# EAGLE board scenes main (EAGLE 7.4.0)
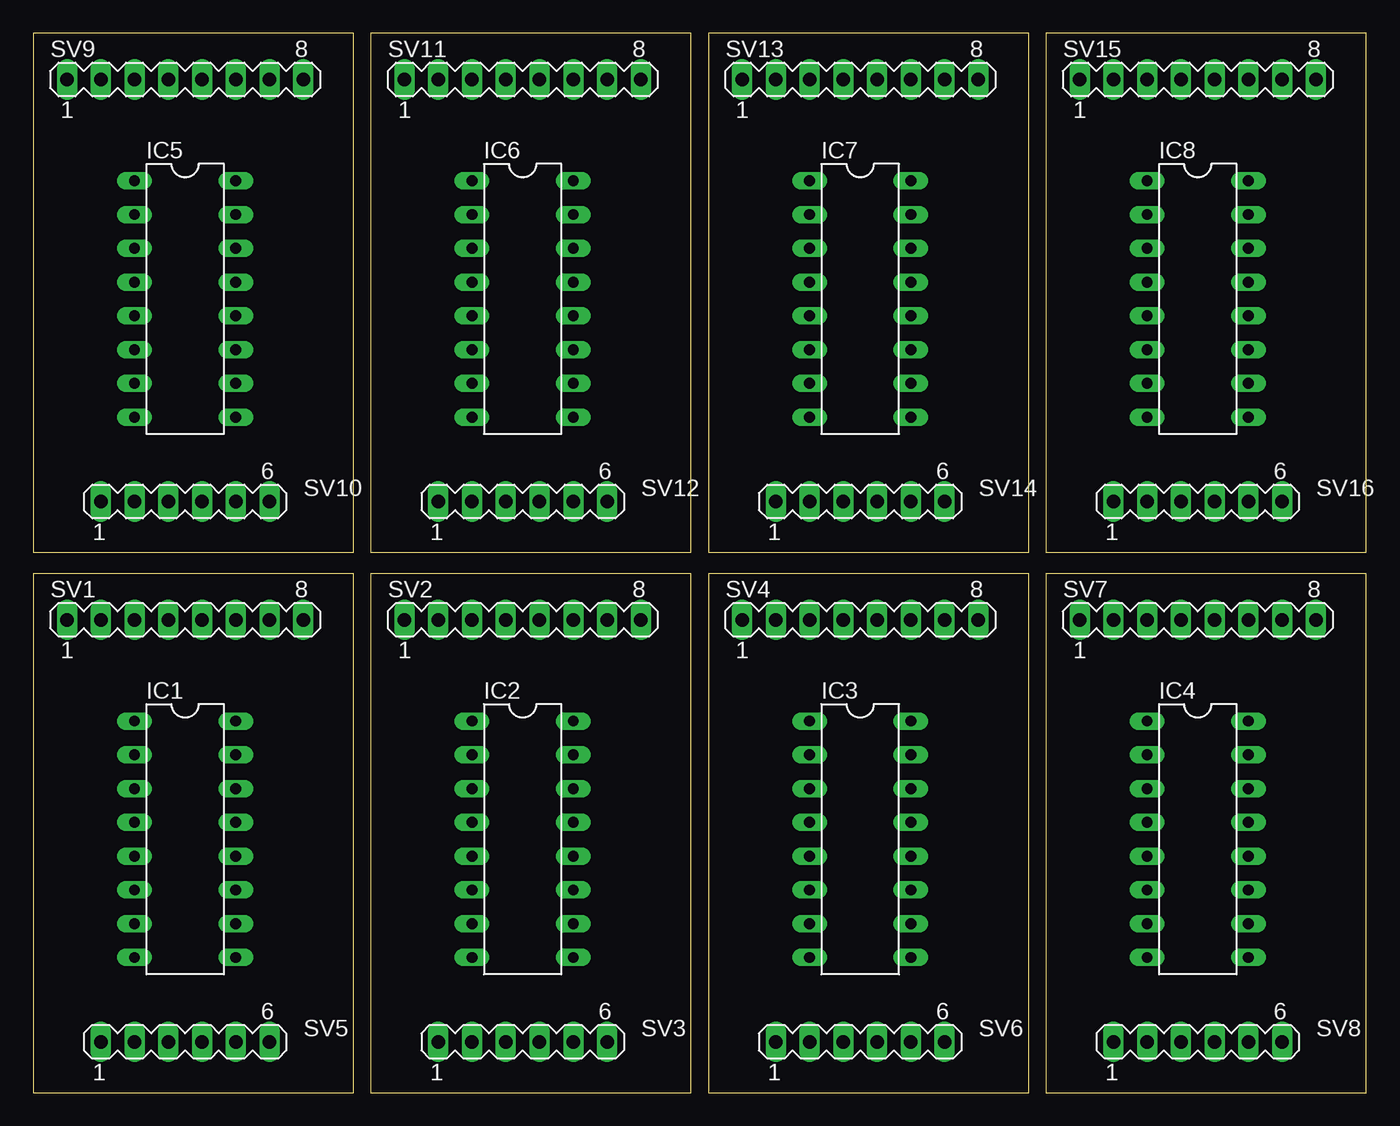
[diagram p0: board, top side]
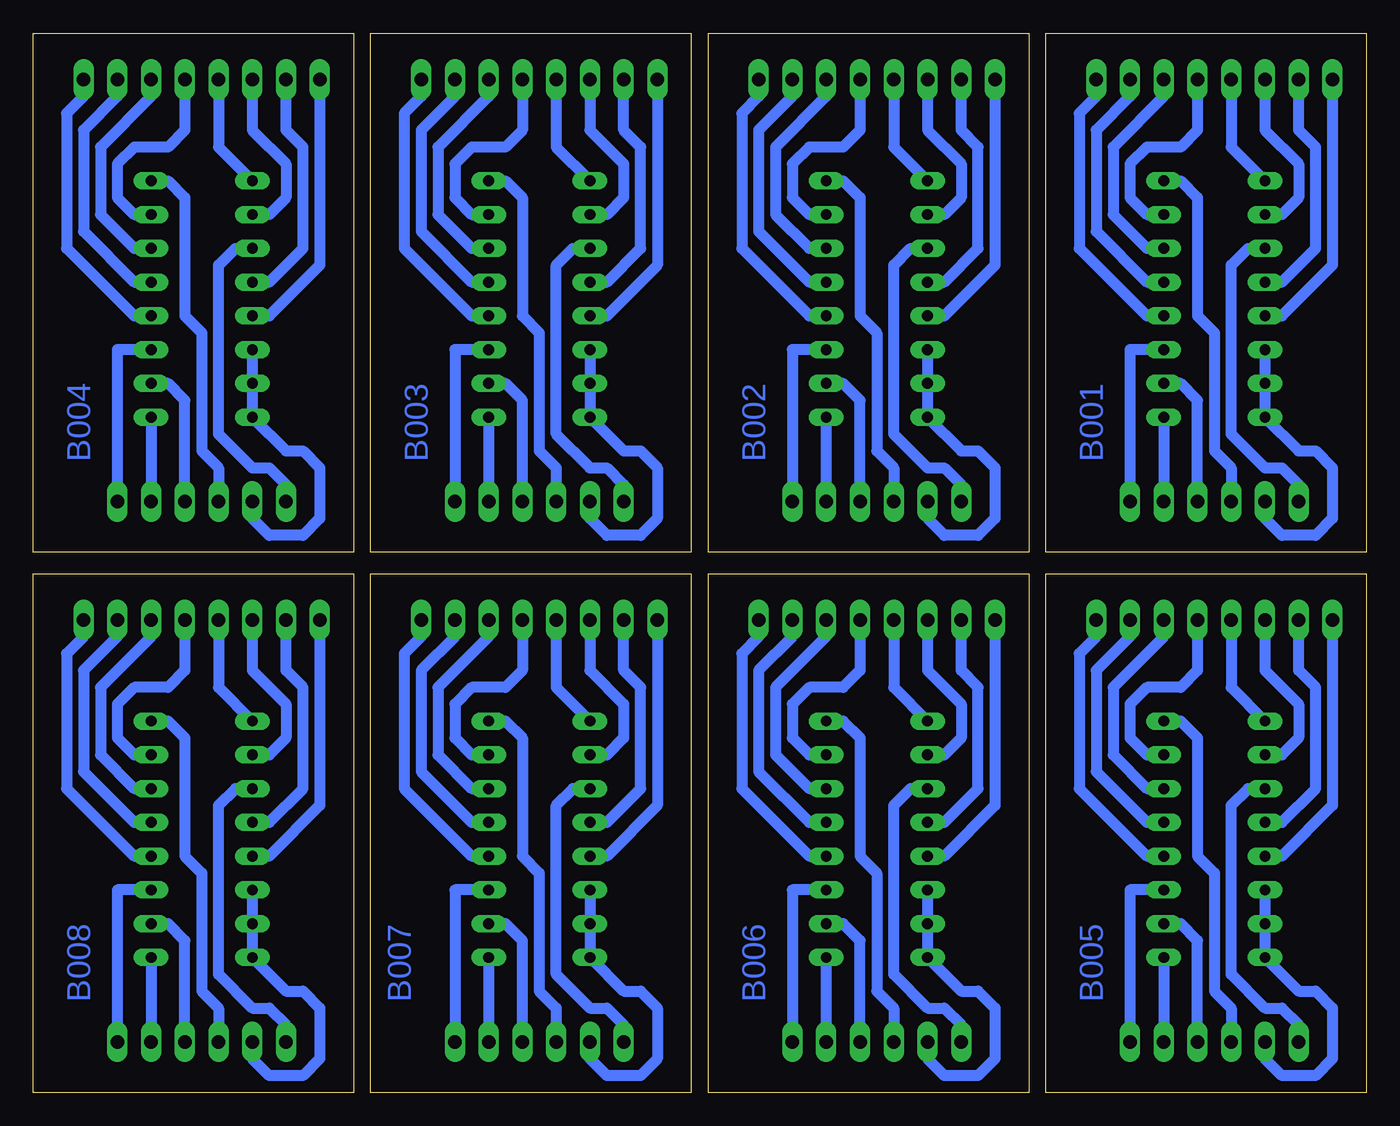
[diagram p1: board, bottom side, seen from below]

Size 100.31 x 79.68 mm. Coordinates in mm from the lower left corner, seen from the top.
Outline: 0,0 24.11,0 24.11,39.04 0,39.04 0,0
Outline: 25.4,0 49.51,0 49.51,39.04 25.4,39.04 25.4,0
Outline: 50.8,0 74.91,0 74.91,39.04 50.8,39.04 50.8,0
Outline: 76.2,0 100.31,0 100.31,39.04 76.2,39.04 76.2,0
Outline: 0,40.64 24.11,40.64 24.11,79.68 0,79.68 0,40.64
Outline: 25.4,40.64 49.51,40.64 49.51,79.68 25.4,79.68 25.4,40.64
Outline: 50.8,40.64 74.91,40.64 74.91,79.68 50.8,79.68 50.8,40.64
Outline: 76.2,40.64 100.31,40.64 100.31,79.68 76.2,79.68 76.2,40.64
Copper layers (1*16): Top 0.035mm / dielectric 1.5mm / Bottom 0.035mm
Design rules "default": minimum track width 10mil, minimum drill 24mil, track to track 8mil, track to pad 8mil, pad to pad 8mil, via to via 8mil, smd to smd 8mil, copper to edge 40mil, drill to drill 8mil, minimum pad ring 10mil, minimum via ring 8mil, stop-mask expansion 4mil, vias tented up to drill 0mil, thermal gap 10mil

## Footprints (pad centres in the part's own frame; a part is rotated, then mirrored left to right if it is on the bottom)
DIL16 = drill 0.813 long: 1 -8.89,-3.81; 2 -6.35,-3.81; 3 -3.81,-3.81; 4 -1.27,-3.81; 5 1.27,-3.81; 6 3.81,-3.81; 7 6.35,-3.81; 8 8.89,-3.81; 9 8.89,3.81; 10 6.35,3.81; 11 3.81,3.81; 12 1.27,3.81; 13 -1.27,3.81; 14 -3.81,3.81; 15 -6.35,3.81; 16 -8.89,3.81
MA08-1 = drill 1.016 long: 1 -8.89,0; 2 -6.35,0; 3 -3.81,0; 4 -1.27,0; 5 1.27,0; 6 3.81,0; 7 6.35,0; 8 8.89,0
MA06-1 = drill 1.016 long: 1 -6.35,0; 2 -3.81,0; 3 -1.27,0; 4 1.27,0; 5 3.81,0; 6 6.35,0

## Placement (x,y rotation side)
IC1  4051N  [DIL16]  11.43,19.05 270 top
IC2  4051N  [DIL16]  36.83,19.05 270 top
IC3  4051N  [DIL16]  62.23,19.05 270 top
IC4  4051N  [DIL16]  87.63,19.05 270 top
IC5  4051N  [DIL16]  11.43,59.69 270 top
IC6  4051N  [DIL16]  36.83,59.69 270 top
IC7  4051N  [DIL16]  62.23,59.69 270 top
IC8  4051N  [DIL16]  87.63,59.69 270 top
SV1  [MA08-1]  11.43,35.56 0 top
SV2  [MA08-1]  36.83,35.56 0 top
SV3  [MA06-1]  36.83,3.81 0 top
SV4  [MA08-1]  62.23,35.56 0 top
SV5  [MA06-1]  11.43,3.81 0 top
SV6  [MA06-1]  62.23,3.81 0 top
SV7  [MA08-1]  87.63,35.56 0 top
SV8  [MA06-1]  87.63,3.81 0 top
SV9  [MA08-1]  11.43,76.2 0 top
SV10  [MA06-1]  11.43,44.45 0 top
SV11  [MA08-1]  36.83,76.2 0 top
SV12  [MA06-1]  36.83,44.45 0 top
SV13  [MA08-1]  62.23,76.2 0 top
SV14  [MA06-1]  62.23,44.45 0 top
SV15  [MA08-1]  87.63,76.2 0 top
SV16  [MA06-1]  87.63,44.45 0 top

## Library data of the parts
IC1-IC8 = 40xx
SV1-SV16 = con-lstb; OC_FARNELL: unknown; OC_NEWARK: unknown

## Nets
GND: IC1.6 IC1.8 SV5.2
GND1: IC2.6 IC2.8 SV3.2
GND2: IC3.6 IC3.8 SV6.2
GND3: IC4.6 IC4.8 SV8.2
GND4: IC5.6 IC5.8 SV10.2
GND5: IC6.6 IC6.8 SV12.2
GND6: IC7.6 IC7.8 SV14.2
GND7: IC8.6 IC8.8 SV16.2
N$1: IC1.1 SV1.4
N$2: IC1.2 SV1.3
N$3: IC1.4 SV1.2
N$4: IC1.5 SV1.1
N$5: IC1.15 SV1.5
N$6: IC1.14 SV1.6
N$7: IC1.13 SV1.7
N$8: IC1.12 SV1.8
N$9: IC1.9 SV5.5
N$10: IC1.10 SV5.4
N$11: IC1.11 SV5.6
N$12: IC2.1 SV2.4
N$13: IC2.2 SV2.3
N$14: IC2.4 SV2.2
N$15: IC2.5 SV2.1
N$16: IC2.15 SV2.5
N$17: IC2.14 SV2.6
N$18: IC2.13 SV2.7
N$19: IC2.12 SV2.8
N$20: IC2.3 SV3.1
N$21: IC2.9 SV3.5
N$22: IC2.10 SV3.4
N$23: IC2.11 SV3.6
N$24: IC3.1 SV4.4
N$25: IC3.2 SV4.3
N$26: IC3.4 SV4.2
N$27: IC3.5 SV4.1
N$28: IC3.15 SV4.5
N$29: IC3.14 SV4.6
N$30: IC3.13 SV4.7
N$31: IC3.12 SV4.8
N$32: IC3.3 SV6.1
N$33: IC3.9 SV6.5
N$34: IC3.10 SV6.4
N$35: IC3.11 SV6.6
N$36: IC4.1 SV7.4
N$37: IC4.2 SV7.3
N$38: IC4.4 SV7.2
N$39: IC4.5 SV7.1
N$40: IC4.15 SV7.5
N$41: IC4.14 SV7.6
N$42: IC4.13 SV7.7
N$43: IC4.12 SV7.8
N$44: IC4.3 SV8.1
N$45: IC4.9 SV8.5
N$46: IC4.10 SV8.4
N$47: IC4.11 SV8.6
N$48: IC5.1 SV9.4
N$49: IC5.2 SV9.3
N$50: IC5.4 SV9.2
N$51: IC5.5 SV9.1
N$52: IC5.15 SV9.5
N$53: IC5.14 SV9.6
N$54: IC5.13 SV9.7
N$55: IC5.12 SV9.8
N$56: IC5.3 SV10.1
N$57: IC5.9 SV10.5
N$58: IC5.10 SV10.4
N$59: IC5.11 SV10.6
N$60: IC6.1 SV11.4
N$61: IC6.2 SV11.3
N$62: IC6.4 SV11.2
N$63: IC6.5 SV11.1
N$64: IC6.15 SV11.5
N$65: IC6.14 SV11.6
N$66: IC6.13 SV11.7
N$67: IC6.12 SV11.8
N$68: IC6.3 SV12.1
N$69: IC6.9 SV12.5
N$70: IC6.10 SV12.4
N$71: IC6.11 SV12.6
N$72: IC7.1 SV13.4
N$73: IC7.2 SV13.3
N$74: IC7.4 SV13.2
N$75: IC1.3 SV5.1
N$83: IC7.5 SV13.1
N$84: IC7.15 SV13.5
N$85: IC7.14 SV13.6
N$86: IC7.13 SV13.7
N$87: IC7.12 SV13.8
N$88: IC7.3 SV14.1
N$89: IC7.9 SV14.5
N$90: IC7.10 SV14.4
N$91: IC7.11 SV14.6
N$92: IC8.1 SV15.4
N$93: IC8.2 SV15.3
N$94: IC8.4 SV15.2
N$95: IC8.5 SV15.1
N$96: IC8.15 SV15.5
N$97: IC8.14 SV15.6
N$98: IC8.13 SV15.7
N$99: IC8.12 SV15.8
N$100: IC8.3 SV16.1
N$101: IC8.9 SV16.5
N$102: IC8.10 SV16.4
N$103: IC8.11 SV16.6
VCC: IC1.16 SV5.3
VCC1: IC2.16 SV3.3
VCC2: IC3.16 SV6.3
VCC3: IC4.16 SV8.3
VCC4: IC5.16 SV10.3
VCC5: IC6.16 SV12.3
VCC6: IC7.16 SV14.3
VCC7: IC8.16 SV16.3
VEE: IC1.7
VEE1: IC2.7
VEE2: IC3.7
VEE3: IC4.7
VEE4: IC5.7
VEE5: IC6.7
VEE6: IC7.7
VEE7: IC8.7

## Tracks (layer width: path | path; a pad name or v marks a point on that pad's centre or on a via)
GND
  Bottom 0.813: IC1.6 IC1.8 5.08,7.62 3.81,7.62 2.54,6.35 2.54,2.54 3.81,1.27 6.35,1.27 7.62,2.54 SV5.2
GND1
  Bottom 0.813: IC2.6 IC2.8 30.48,7.62 29.21,7.62 27.94,6.35 27.94,2.54 29.21,1.27 31.75,1.27 33.02,2.54 SV3.2
GND2
  Bottom 0.813: IC3.6 IC3.8 55.88,7.62 54.61,7.62 53.34,6.35 53.34,2.54 54.61,1.27 57.15,1.27 58.42,2.54 SV6.2
GND3
  Bottom 0.813: IC4.6 IC4.8 81.28,7.62 80.01,7.62 78.74,6.35 78.74,2.54 80.01,1.27 82.55,1.27 83.82,2.54 SV8.2
GND4
  Bottom 0.813: IC5.6 IC5.8 5.08,48.26 3.81,48.26 2.54,46.99 2.54,43.18 3.81,41.91 6.35,41.91 7.62,43.18 SV10.2
GND5
  Bottom 0.813: IC6.6 IC6.8 30.48,48.26 29.21,48.26 27.94,46.99 27.94,43.18 29.21,41.91 31.75,41.91 33.02,43.18 SV12.2
GND6
  Bottom 0.813: IC7.6 IC7.8 55.88,48.26 54.61,48.26 53.34,46.99 53.34,43.18 54.61,41.91 57.15,41.91 58.42,43.18 SV14.2
GND7
  Bottom 0.813: IC8.6 IC8.8 81.28,48.26 80.01,48.26 78.74,46.99 78.74,43.18 80.01,41.91 82.55,41.91 83.82,43.18 SV16.2
N$1
  Bottom 0.813: SV1.4 10.16,30.48 IC1.1
N$2
  Bottom 0.813: SV1.3 7.62,31.75 5.08,29.21 5.08,26.67 6.35,25.4 IC1.2
N$3
  Bottom 0.813: SV1.2 5.08,31.75 3.81,30.48 3.81,22.86 6.35,20.32 IC1.4
N$4
  Bottom 0.813: SV1.1 2.54,21.59 6.35,17.78 IC1.5
N$5
  Bottom 0.813: SV1.5 12.7,31.75 13.97,30.48 16.51,30.48 17.78,29.21 17.78,26.67 16.51,25.4 IC1.15
N$6
  Bottom 0.813: SV1.6 15.24,34.29 19.05,30.48 19.05,25.4 16.51,22.86 IC1.14
N$7
  Bottom 0.813: SV1.7 17.78,34.29 20.32,31.75 20.32,24.13 16.51,20.32 IC1.13
N$8
  Bottom 0.813: SV1.8 20.32,34.29 21.59,33.02 21.59,22.86 16.51,17.78 IC1.12
N$9
  Bottom 0.813: IC1.9 SV5.5
N$10
  Bottom 0.813: SV5.4 12.7,11.43 13.97,12.7 IC1.10
N$11
  Bottom 0.813: IC1.11 17.78,15.24 SV5.6
N$12
  Bottom 0.813: SV2.4 35.56,30.48 IC2.1
N$13
  Bottom 0.813: SV2.3 33.02,31.75 30.48,29.21 30.48,26.67 31.75,25.4 IC2.2
N$14
  Bottom 0.813: SV2.2 30.48,31.75 29.21,30.48 29.21,22.86 31.75,20.32 IC2.4
N$15
  Bottom 0.813: SV2.1 27.94,21.59 31.75,17.78 IC2.5
N$16
  Bottom 0.813: SV2.5 38.1,31.75 39.37,30.48 41.91,30.48 43.18,29.21 43.18,26.67 41.91,25.4 IC2.15
N$17
  Bottom 0.813: SV2.6 40.64,34.29 44.45,30.48 44.45,25.4 41.91,22.86 IC2.14
N$18
  Bottom 0.813: SV2.7 43.18,34.29 45.72,31.75 45.72,24.13 41.91,20.32 IC2.13
N$19
  Bottom 0.813: SV2.8 45.72,34.29 46.99,33.02 46.99,22.86 41.91,17.78 IC2.12
N$20
  Bottom 0.813: IC2.3 34.29,22.86 35.56,21.59 35.56,8.89 33.02,6.35 31.75,6.35 30.48,5.08 SV3.1
N$21
  Bottom 0.813: IC2.9 SV3.5
N$22
  Bottom 0.813: SV3.4 38.1,11.43 39.37,12.7 IC2.10
N$23
  Bottom 0.813: IC2.11 43.18,15.24 SV3.6
N$24
  Bottom 0.813: SV4.4 60.96,30.48 IC3.1
N$25
  Bottom 0.813: SV4.3 58.42,31.75 55.88,29.21 55.88,26.67 57.15,25.4 IC3.2
N$26
  Bottom 0.813: SV4.2 55.88,31.75 54.61,30.48 54.61,22.86 57.15,20.32 IC3.4
N$27
  Bottom 0.813: SV4.1 53.34,21.59 57.15,17.78 IC3.5
N$28
  Bottom 0.813: SV4.5 63.5,31.75 64.77,30.48 67.31,30.48 68.58,29.21 68.58,26.67 67.31,25.4 IC3.15
N$29
  Bottom 0.813: SV4.6 66.04,34.29 69.85,30.48 69.85,25.4 67.31,22.86 IC3.14
N$30
  Bottom 0.813: SV4.7 68.58,34.29 71.12,31.75 71.12,24.13 67.31,20.32 IC3.13
N$31
  Bottom 0.813: SV4.8 71.12,34.29 72.39,33.02 72.39,22.86 67.31,17.78 IC3.12
N$32
  Bottom 0.813: IC3.3 59.69,22.86 60.96,21.59 60.96,8.89 58.42,6.35 57.15,6.35 55.88,5.08 SV6.1
N$33
  Bottom 0.813: IC3.9 SV6.5
N$34
  Bottom 0.813: SV6.4 63.5,11.43 64.77,12.7 IC3.10
N$35
  Bottom 0.813: IC3.11 68.58,15.24 SV6.6
N$36
  Bottom 0.813: SV7.4 86.36,30.48 IC4.1
N$37
  Bottom 0.813: SV7.3 83.82,31.75 81.28,29.21 81.28,26.67 82.55,25.4 IC4.2
N$38
  Bottom 0.813: SV7.2 81.28,31.75 80.01,30.48 80.01,22.86 82.55,20.32 IC4.4
N$39
  Bottom 0.813: SV7.1 78.74,21.59 82.55,17.78 IC4.5
N$40
  Bottom 0.813: SV7.5 88.9,31.75 90.17,30.48 92.71,30.48 93.98,29.21 93.98,26.67 92.71,25.4 IC4.15
N$41
  Bottom 0.813: SV7.6 91.44,34.29 95.25,30.48 95.25,25.4 92.71,22.86 IC4.14
N$42
  Bottom 0.813: SV7.7 93.98,34.29 96.52,31.75 96.52,24.13 92.71,20.32 IC4.13
N$43
  Bottom 0.813: SV7.8 96.52,34.29 97.79,33.02 97.79,22.86 92.71,17.78 IC4.12
N$44
  Bottom 0.813: IC4.3 85.09,22.86 86.36,21.59 86.36,8.89 83.82,6.35 82.55,6.35 81.28,5.08 SV8.1
N$45
  Bottom 0.813: IC4.9 SV8.5
N$46
  Bottom 0.813: SV8.4 88.9,11.43 90.17,12.7 IC4.10
N$47
  Bottom 0.813: IC4.11 93.98,15.24 SV8.6
N$48
  Bottom 0.813: SV9.4 10.16,71.12 IC5.1
N$49
  Bottom 0.813: SV9.3 7.62,72.39 5.08,69.85 5.08,67.31 6.35,66.04 IC5.2
N$50
  Bottom 0.813: SV9.2 5.08,72.39 3.81,71.12 3.81,63.5 6.35,60.96 IC5.4
N$51
  Bottom 0.813: SV9.1 2.54,62.23 6.35,58.42 IC5.5
N$52
  Bottom 0.813: SV9.5 12.7,72.39 13.97,71.12 16.51,71.12 17.78,69.85 17.78,67.31 16.51,66.04 IC5.15
N$53
  Bottom 0.813: SV9.6 15.24,74.93 19.05,71.12 19.05,66.04 16.51,63.5 IC5.14
N$54
  Bottom 0.813: SV9.7 17.78,74.93 20.32,72.39 20.32,64.77 16.51,60.96 IC5.13
N$55
  Bottom 0.813: SV9.8 20.32,74.93 21.59,73.66 21.59,63.5 16.51,58.42 IC5.12
N$56
  Bottom 0.813: IC5.3 8.89,63.5 10.16,62.23 10.16,49.53 7.62,46.99 6.35,46.99 5.08,45.72 SV10.1
N$57
  Bottom 0.813: IC5.9 SV10.5
N$58
  Bottom 0.813: SV10.4 12.7,52.07 13.97,53.34 IC5.10
N$59
  Bottom 0.813: IC5.11 17.78,55.88 SV10.6
N$60
  Bottom 0.813: SV11.4 35.56,71.12 IC6.1
N$61
  Bottom 0.813: SV11.3 33.02,72.39 30.48,69.85 30.48,67.31 31.75,66.04 IC6.2
N$62
  Bottom 0.813: SV11.2 30.48,72.39 29.21,71.12 29.21,63.5 31.75,60.96 IC6.4
N$63
  Bottom 0.813: SV11.1 27.94,62.23 31.75,58.42 IC6.5
N$64
  Bottom 0.813: SV11.5 38.1,72.39 39.37,71.12 41.91,71.12 43.18,69.85 43.18,67.31 41.91,66.04 IC6.15
N$65
  Bottom 0.813: SV11.6 40.64,74.93 44.45,71.12 44.45,66.04 41.91,63.5 IC6.14
N$66
  Bottom 0.813: SV11.7 43.18,74.93 45.72,72.39 45.72,64.77 41.91,60.96 IC6.13
N$67
  Bottom 0.813: SV11.8 45.72,74.93 46.99,73.66 46.99,63.5 41.91,58.42 IC6.12
N$68
  Bottom 0.813: IC6.3 34.29,63.5 35.56,62.23 35.56,49.53 33.02,46.99 31.75,46.99 30.48,45.72 SV12.1
N$69
  Bottom 0.813: IC6.9 SV12.5
N$70
  Bottom 0.813: SV12.4 38.1,52.07 39.37,53.34 IC6.10
N$71
  Bottom 0.813: IC6.11 43.18,55.88 SV12.6
N$72
  Bottom 0.813: SV13.4 60.96,71.12 IC7.1
N$73
  Bottom 0.813: SV13.3 58.42,72.39 55.88,69.85 55.88,67.31 57.15,66.04 IC7.2
N$74
  Bottom 0.813: SV13.2 55.88,72.39 54.61,71.12 54.61,63.5 57.15,60.96 IC7.4
N$75
  Bottom 0.813: IC1.3 8.89,22.86 10.16,21.59 10.16,8.89 7.62,6.35 6.35,6.35 5.08,5.08 SV5.1
N$83
  Bottom 0.813: SV13.1 53.34,62.23 57.15,58.42 IC7.5
N$84
  Bottom 0.813: SV13.5 63.5,72.39 64.77,71.12 67.31,71.12 68.58,69.85 68.58,67.31 67.31,66.04 IC7.15
N$85
  Bottom 0.813: SV13.6 66.04,74.93 69.85,71.12 69.85,66.04 67.31,63.5 IC7.14
N$86
  Bottom 0.813: SV13.7 68.58,74.93 71.12,72.39 71.12,64.77 67.31,60.96 IC7.13
N$87
  Bottom 0.813: SV13.8 71.12,74.93 72.39,73.66 72.39,63.5 67.31,58.42 IC7.12
N$88
  Bottom 0.813: IC7.3 59.69,63.5 60.96,62.23 60.96,49.53 58.42,46.99 57.15,46.99 55.88,45.72 SV14.1
N$89
  Bottom 0.813: IC7.9 SV14.5
N$90
  Bottom 0.813: SV14.4 63.5,52.07 64.77,53.34 IC7.10
N$91
  Bottom 0.813: IC7.11 68.58,55.88 SV14.6
N$92
  Bottom 0.813: SV15.4 86.36,71.12 IC8.1
N$93
  Bottom 0.813: SV15.3 83.82,72.39 81.28,69.85 81.28,67.31 82.55,66.04 IC8.2
N$94
  Bottom 0.813: SV15.2 81.28,72.39 80.01,71.12 80.01,63.5 82.55,60.96 IC8.4
N$95
  Bottom 0.813: SV15.1 78.74,62.23 82.55,58.42 IC8.5
N$96
  Bottom 0.813: SV15.5 88.9,72.39 90.17,71.12 92.71,71.12 93.98,69.85 93.98,67.31 92.71,66.04 IC8.15
N$97
  Bottom 0.813: SV15.6 91.44,74.93 95.25,71.12 95.25,66.04 92.71,63.5 IC8.14
N$98
  Bottom 0.813: SV15.7 93.98,74.93 96.52,72.39 96.52,64.77 92.71,60.96 IC8.13
N$99
  Bottom 0.813: SV15.8 96.52,74.93 97.79,73.66 97.79,63.5 92.71,58.42 IC8.12
N$100
  Bottom 0.813: IC8.3 85.09,63.5 86.36,62.23 86.36,49.53 83.82,46.99 82.55,46.99 81.28,45.72 SV16.1
N$101
  Bottom 0.813: IC8.9 SV16.5
N$102
  Bottom 0.813: SV16.4 88.9,52.07 90.17,53.34 IC8.10
N$103
  Bottom 0.813: IC8.11 93.98,55.88 SV16.6
VCC
  Bottom 0.813: IC1.16 13.97,27.94 12.7,26.67 12.7,17.78 11.43,16.51 11.43,7.62 10.16,6.35 SV5.3
VCC1
  Bottom 0.813: IC2.16 39.37,27.94 38.1,26.67 38.1,17.78 36.83,16.51 36.83,7.62 35.56,6.35 SV3.3
VCC2
  Bottom 0.813: IC3.16 64.77,27.94 63.5,26.67 63.5,17.78 62.23,16.51 62.23,7.62 60.96,6.35 SV6.3
VCC3
  Bottom 0.813: IC4.16 90.17,27.94 88.9,26.67 88.9,17.78 87.63,16.51 87.63,7.62 86.36,6.35 SV8.3
VCC4
  Bottom 0.813: IC5.16 13.97,68.58 12.7,67.31 12.7,58.42 11.43,57.15 11.43,48.26 10.16,46.99 SV10.3
VCC5
  Bottom 0.813: IC6.16 39.37,68.58 38.1,67.31 38.1,58.42 36.83,57.15 36.83,48.26 35.56,46.99 SV12.3
VCC6
  Bottom 0.813: IC7.16 64.77,68.58 63.5,67.31 63.5,58.42 62.23,57.15 62.23,48.26 60.96,46.99 SV14.3
VCC7
  Bottom 0.813: IC8.16 90.17,68.58 88.9,67.31 88.9,58.42 87.63,57.15 87.63,48.26 86.36,46.99 SV16.3

## Text on the board
Bottom: B001 | B002 | B003 | B004 | B005 | B006 | B007 | B008
Document: out | gnd | vcc | B | C | A